# Altium PCB rectifier.PcbDoc
Units mm, origin at the board's own origin, x right, y up, seen from the top; angles counter-clockwise.
Board outline 60 x 16 mm, 2 copper layers (Top Layer, Bottom Layer), stack 1.671 mm thick; 9 components, 5 nets, 18 pads, 0 vias.
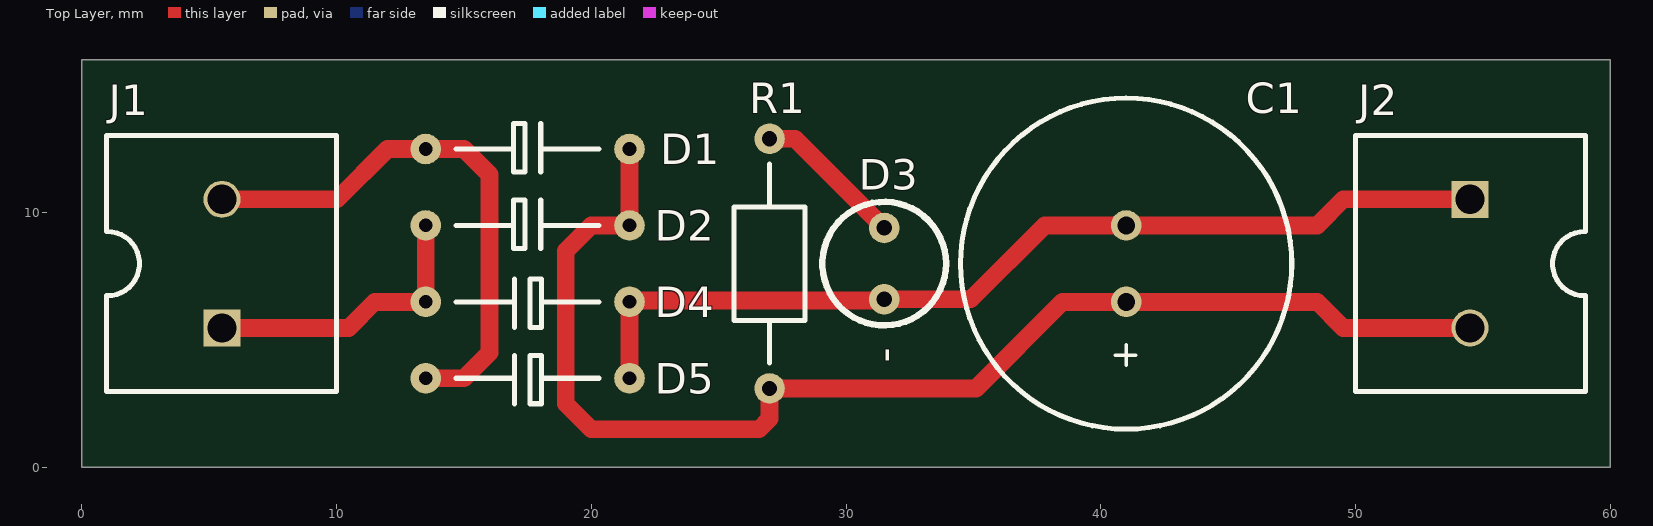
[diagram p0: Top Layer view]
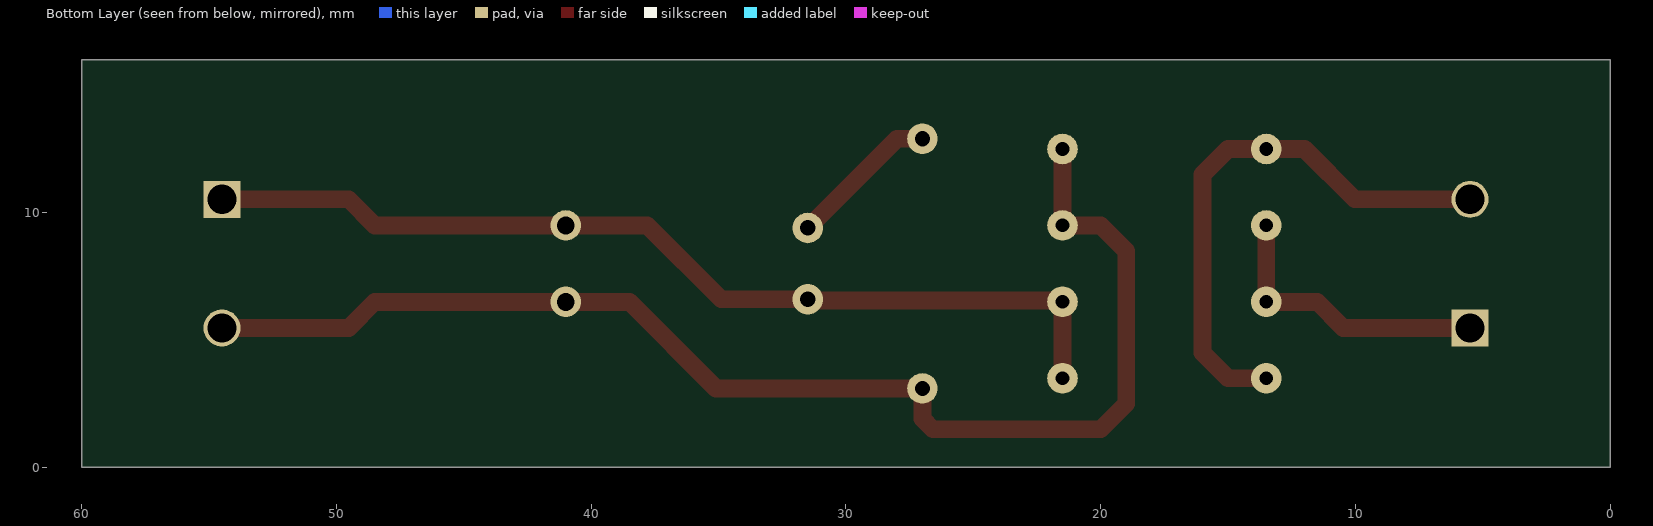
[diagram p1: Bottom Layer view, seen from below]
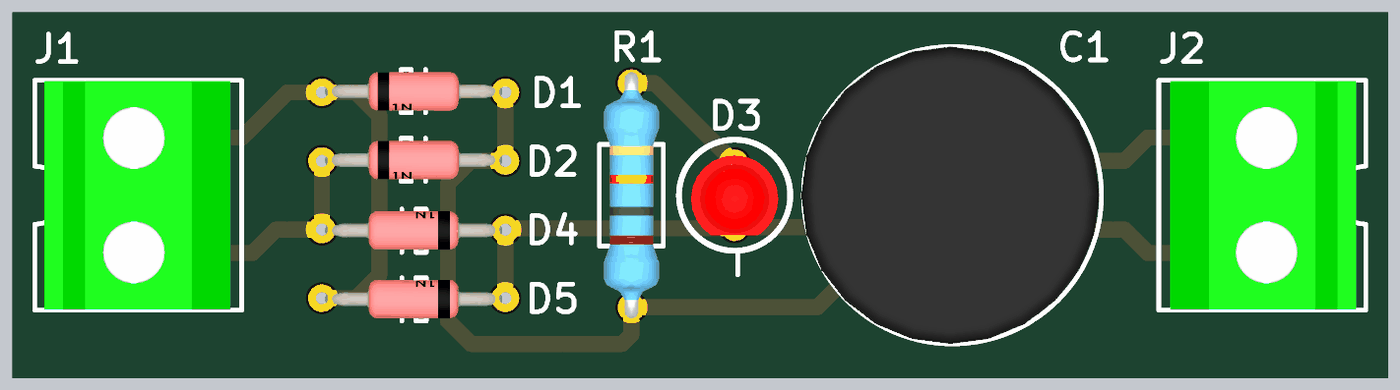
[diagram p2: 3D render of the assembled board from above, using the file's embedded part models]

## Layer stack, top to bottom
Top Solder: solder mask 0.0102, Solder Resist, Dk 3.5
Top Layer: signal copper 0.0356
Dielectric 1: dielectric 1.6, FR-4, Dk 4.8
Bottom Layer: signal copper 0.0356
Bottom Solder: solder mask 0.0102, Solder Resist, Dk 3.5

## Board outline
60,16 60,0 0,0 0,16

## Design rules (kind name [scope] priority, off if disabled: settings)
Clearance [All] p1: gap=0.3 ignorepadtopadclearanceinfootprint=FALSE
PolygonConnect [All] p1: connectstyle=Relief reliefconductorwidth=0.254 reliefentries=4 polygonreliefangle="90 Angle" airgapwidth=0.254
RoutingVias [All] p1: holewidth=0.3 width=0.6 viastyle="Through Hole" minholewidth=0.3 minwidth=0.6 maxholewidth=0.3 maxwidth=0.6
SolderMaskExpansion [All] p1: expansion=0.102 istentingtop=FALSE
Width [All] p1: maxlimit=1 minlimit=0.3 preferedwidth=0.5
30 further rules are at their usual default settings.

## Components (designator, comment, footprint, x,y, rotation, side; value= is the part's Value field where it differs from the comment)
C1 "Capacitor 1000uF 25V" "CAPACITOR 1000UF 25V" 41,8 r90 top
D1 "Diode" "DIODE 1N914" 17.5,12.5 r180 top
D2 "Diode" "DIODE 1N914" 17.5,9.5 r180 top
D3 "3mm red LED" "LED 3MM RED" 31.5,8 r90 top
D4 "Diode" "DIODE 1N914" 17.5,6.5 r0 top
D5 "Diode" "DIODE 1N914" 17.5,3.5 r0 top
J1 "1X2 header, screw" "HEADER, SCREW" 5.5,8 r90 top
J2 "1X2 header, screw" "HEADER, SCREW" 54.5,8 r270 top
R1 "10K, 0.25W" "RESISTOR 10K, 0.25W" 27,8 r270 top

## Footprints (in the part's own frame and the unit in brackets; to place one, negate y for a bottom-side part, rotate by r counter-clockwise, add the part's x,y. Pads: shape width x height; smd on the part's side, far side on the other; paste and mask are expansions set on the pad)
"CAPACITOR 1000UF 25V" [mm]
  round 1.2 hole 0.7: 1(-1.5,0) 2(1.5,0)
  silkscreen extent -6.5,-6.5 6.5,6.5, body extent -6.5,-6.41 6.5,6.61, height 21.02
"DIODE 1N914" [mm]
  round 1.2 hole 0.533: 1(-4,0) 2(4,0)
  silkscreen extent -2.8,-1 2.8,0.9, body extent -3.86,-0.88 3.86,0.8, height 0.83
"HEADER, SCREW" [mm]
  rect 1.45x1.45 hole 1.15: 1(-2.525,0)
  round 1.45 hole 1.15: 2(2.525,0)
  silkscreen extent -5.03,-4.5 5.03,4.52, body extent -5,-4 5,4.1, height 10.1
"LED 3MM RED" [mm]
  round 1.2 hole 0.61: 1(-1.4,0) 2(1.4,0)
  silkscreen extent -2.43,-2.43 2.43,2.42, body extent -1.76,-1.9 1.74,1.9, height 6.5
"RESISTOR 10K, 0.25W" [mm]
  round 1.2 hole 0.6: 1(-4.9,0) 2(4.9,0)
  silkscreen extent -3.9,-1.4 3.9,1.4, body extent -5.38,-1.19 5.38,1.19, height 2.41

## Part data
C1: library part 108CKR025M, Capacitance=1000uF, Manufacturer=CKR/CKS, Voltage=25V, Part No=108CKR025M
D1 D2 D4 D5: library part 1N914, Manufacturer=onsemi, Part No=1N914
D3: library part OVLBR4CL, Colour=Red, Manufacturer="TT electronics", Part No=OVLBR4CL
J1 J2: library part 796683-2, "header, Screw, PCB mount", Manufacturer="TE Connectivity", Part No=796683-2
R1: library part Resistor, Manufacturer="Yageo Corporation"

## Nets (pads, with @x,y where several pads share a name; then routed paths per layer and width w, separated by ;. In a path a pad name is that pad's centre, name@x,y a point inside that pad or via, vN(x,y) a via of type N, cw(c..) or ccw(c..) an arc to the next point about the centre after c; other vN are vias at no path point)
IN1: D2.2 D4.1 J1.1 | length 11.4
  Top Layer w0.7: J1.1 10.475,5.475 11.5,6.5 D4.1 D2.2
IN2: D1.2 D5.1 J1.2 | length 21.6
  Top Layer w0.7: J1.2 10.025,10.525 12,12.5 D1.2 15,12.5 16,11.5 16,4.5 15,3.5 D5.1
LED: D3.2 R1.1 | length 5.9
  Top Layer w0.7: R1.1 28,12.9 D3.2
OUT1: C1.1 D1.1 D2.1 J2.2 R1.2 | length 51
  Top Layer w0.7: D1.1 D2.1 20,9.5 19,8.5 19,2.5 20,1.5 26.59,1.5 27,1.91 R1.2 35.1,3.1 38.5,6.5 C1.1 48.5,6.5 49.525,5.475 J2.2
OUT2: C1.2 D3.1 D4.2 D5.2 J2.1 | length 37.7
  Top Layer w0.7: D5.2 D4.2 21.55,6.55 31.45,6.55 D3.1 34.9,6.6 37.8,9.5 C1.2 48.5,9.5 49.525,10.525 J2.1

## Silkscreen, mask and mechanical layers (free items; w line width, h text height)
Board Outline:
  the board outline again, w0.1

## Text inside footprints (layer, text, board x,y; h text height)
D1: Mechanical 29 "-" at 12.1,12.85 h0.7 r180
D2: Mechanical 29 "-" at 12.1,9.85 h0.7 r180
D3: Top Overlay "-" at 32.1,4.1 h1.2 r90
D4: Mechanical 29 "-" at 22.9,6.15 h0.7
D5: Mechanical 29 "-" at 22.9,3.15 h0.7